# Altium PCB PCB1.PcbDoc (part 1 of 2)
Units mil, origin at the board's own origin, x right, y up, seen from the top; angles counter-clockwise.
Board outline 2200 x 3595 mil, 2 copper layers (Top Layer, Bottom Layer), stack 1.929 mil thick; 92 components, 67 nets, 296 pads, 85 vias.
Unrouted connection lines stored in the file: 1.
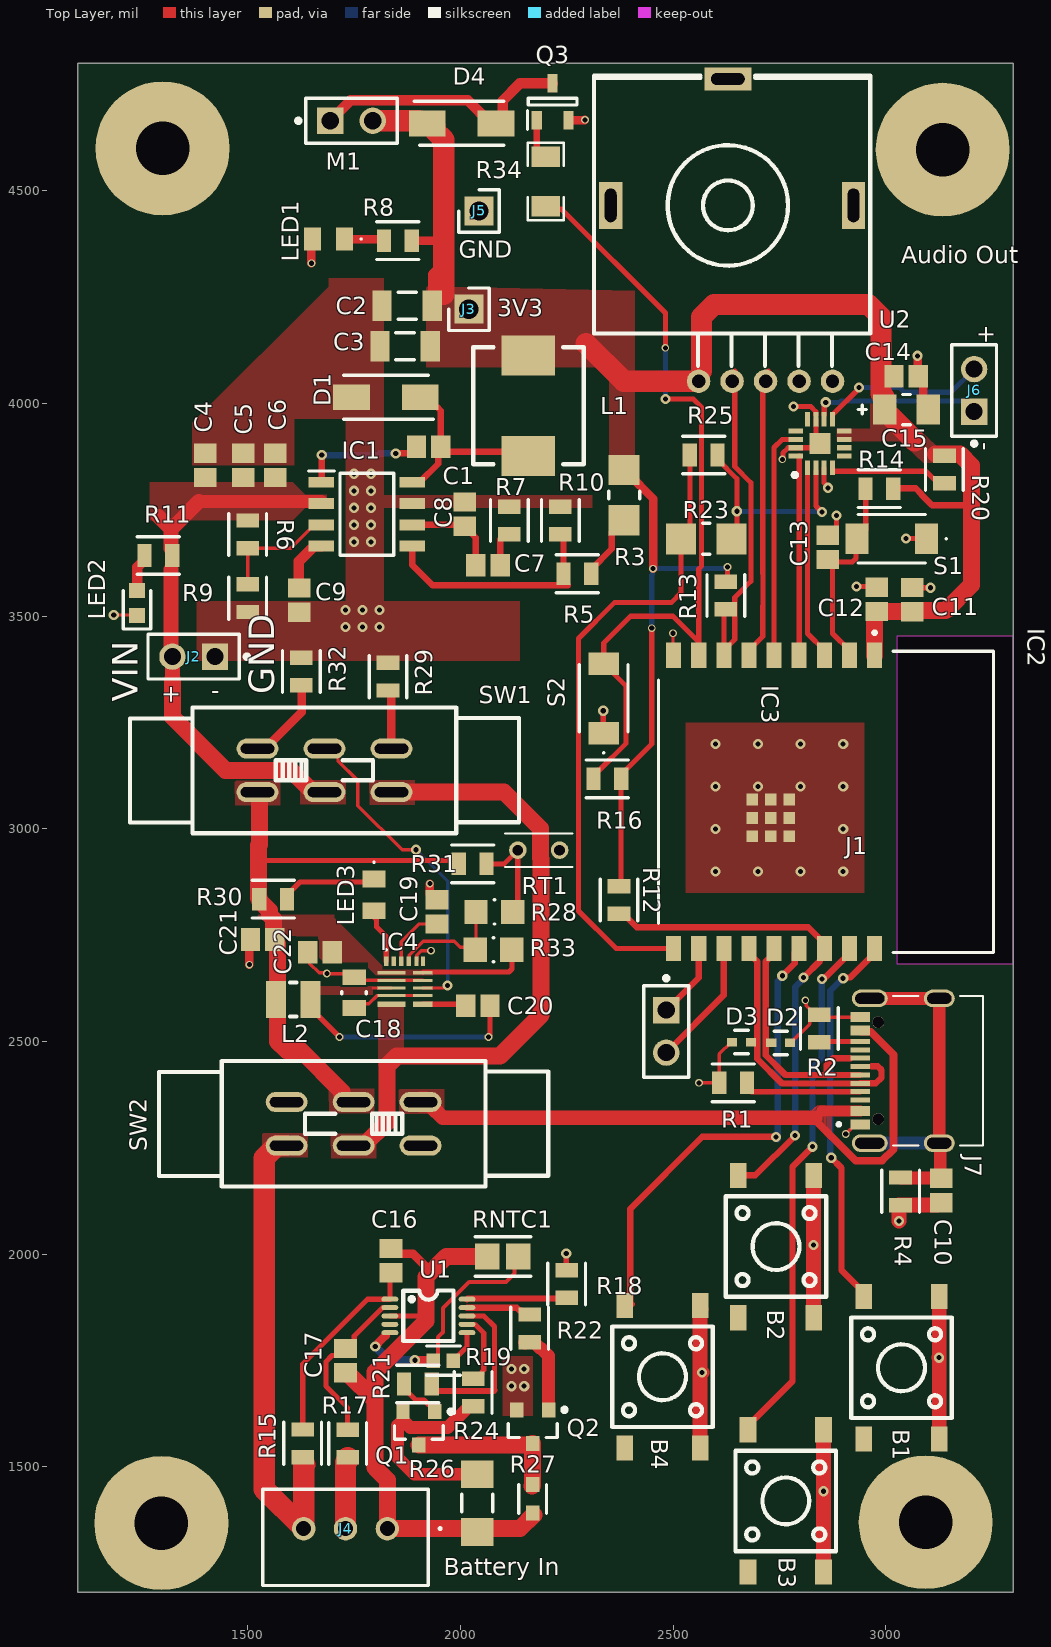
[diagram p0: Top Layer view]
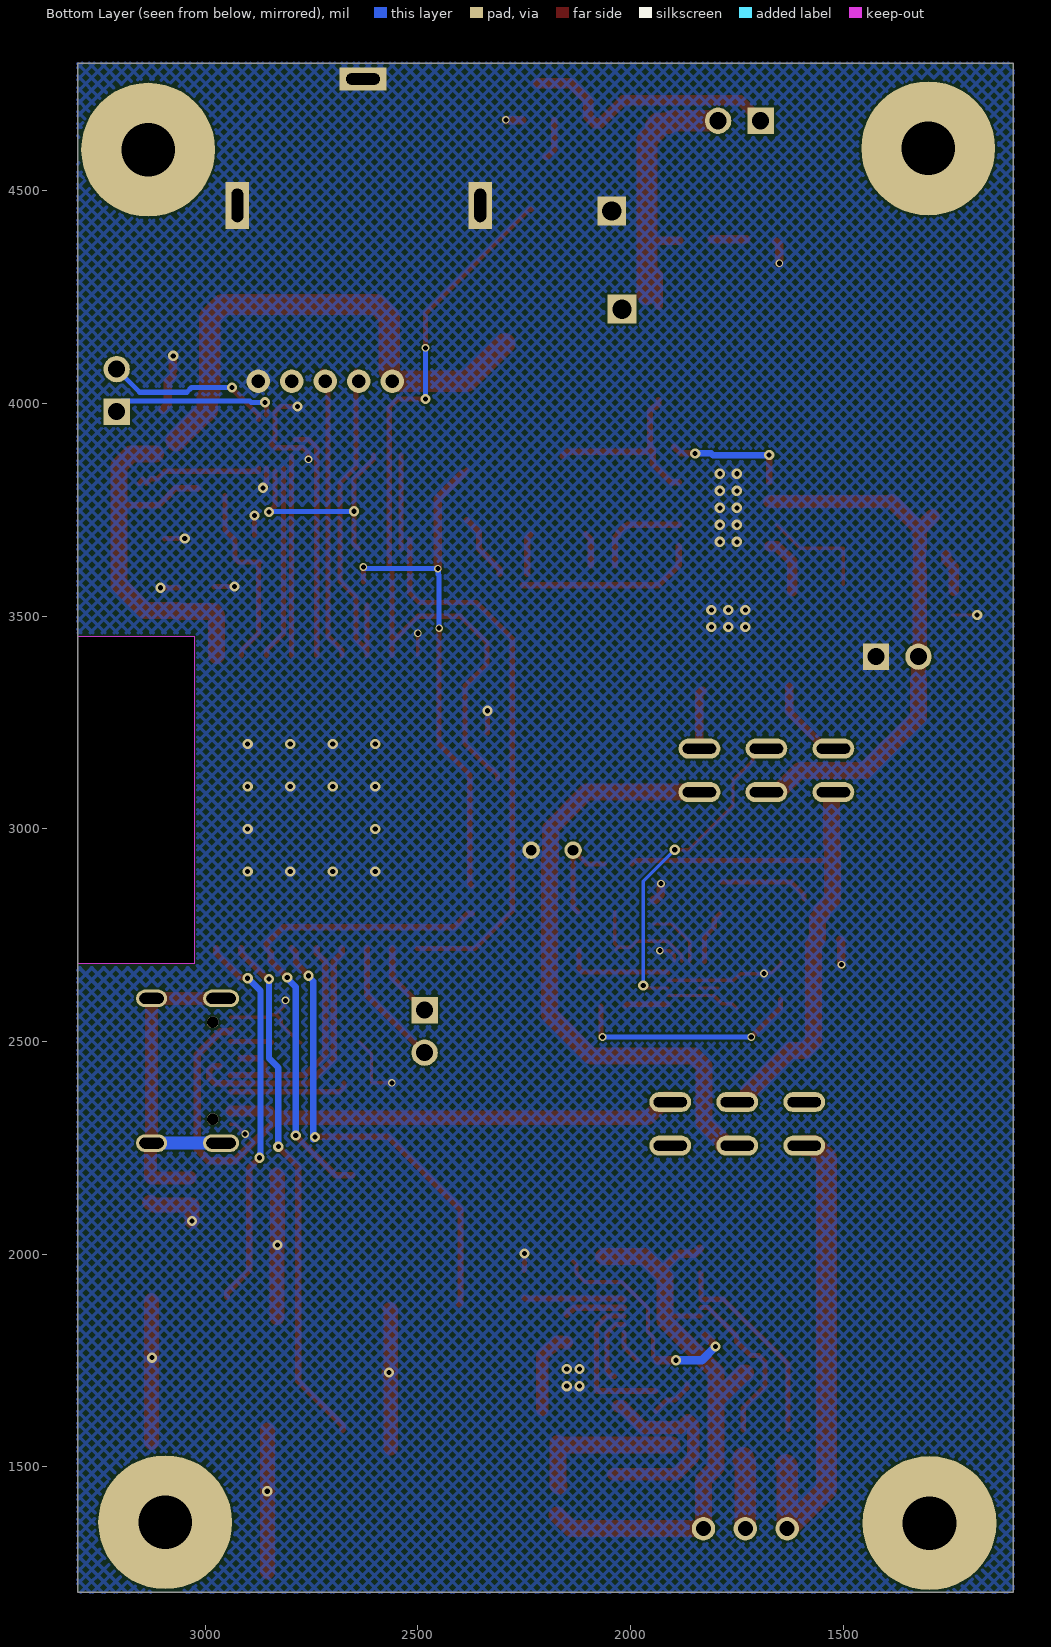
[diagram p1: Bottom Layer view, seen from below]
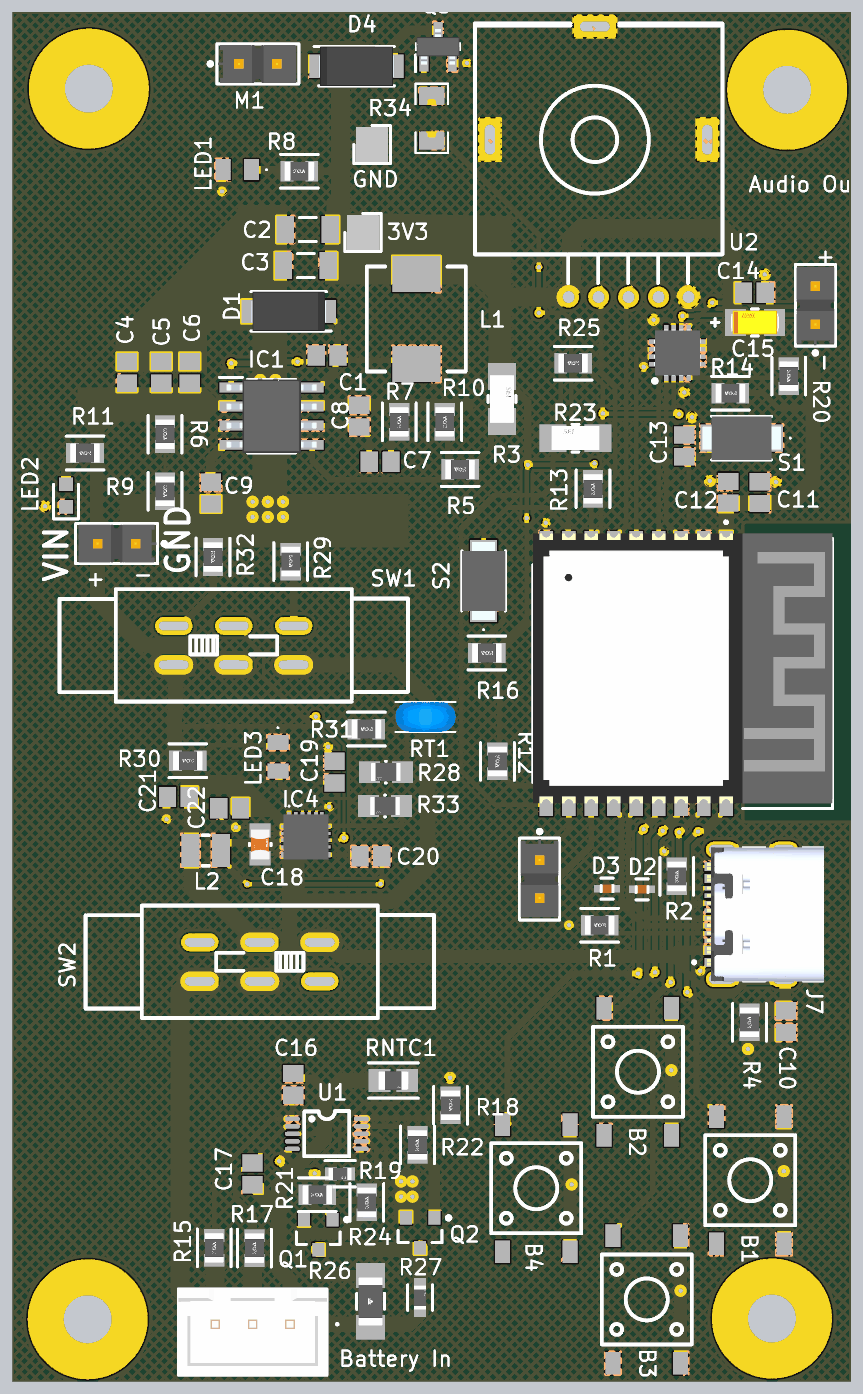
[diagram p2: 3D render of the assembled board from above, using the file's embedded part models]

## Layer stack, top to bottom
Board Layer Stack Top Coverlay: solder mask 1.083, FC-001, Dk 2.9
Top Layer: signal copper 0.4724
Dielectric 1: prepreg 0.984, PP-001, Dk 3.3
Bottom Layer: signal copper 0.4724
Board Layer Stack Bottom Coverlay: solder mask 1.083, FC-001, Dk 2.9

## Board outline
1100,1205 1100,1600 1100,4500 1100,4800 3300,4800 3300,1205
cut-out: 3026,3453 3026,2683 3300,2683 3300,3453

## Design rules (kind name [scope] priority, off if disabled: settings)
Clearance Clearance2 [OnLayer('Power')] p1: gap=10 ignorepadtopadclearanceinfootprint=TRUE
Clearance Clearance_1 [All] p2: gap=4.5 ignorepadtopadclearanceinfootprint=TRUE
DiffPairsRouting [All] p1: maxlimit=5 minlimit=4.5 mostfreqgap=4.5 toplayer_minwidth=12.65 toplayer_maxwidth=14.97 toplayer_prefwidth=12.65 bottomlayer_minwidth=12.65 bottomlayer_maxwidth=14.97 bottomlayer_prefwidth=12.65 maxuncoupledlength=500
HoleSize [All] p1 off: absolutevalues=TRUE maxlimit=100 minlimit=1 maxpercent=80.000 minpercent=20.000
MinimumSolderMaskSliver [All] p1 off: minsoldermaskwidth=10
PolygonConnect [All] p1: connectstyle=Direct reliefconductorwidth=10 reliefentries=4 polygonreliefangle="90 Angle" airgapwidth=10
RoutingVias [All] p1: holewidth=12 width=24 viastyle="Through Hole" minholewidth=12 minwidth=18 maxholewidth=25 maxwidth=50
SilkToSilkClearance [All] p1 off: silktosilkclearance=10
SilkToSolderMaskClearance [IsPad] p1 off: minsilkscreentomaskgap=10 clearancetoexposedcopper=TRUE
SolderMaskExpansion [All] p1: expansion=4 istentingtop=FALSE
SupplyNets "Schematic Supply Nets_10" [InNet('GND')] p1: voltage=0.000
SupplyNets "Schematic Supply Nets_9" [InNet('Midtap')] p2: voltage=0.000
SupplyNets "Schematic Supply Nets_8" [InNet('+5_preswitch')] p3: voltage=0.000
SupplyNets "Schematic Supply Nets_6" [InNet('Bat+_Preswitch')] p4: voltage=0.000
SupplyNets "Schematic Supply Nets_5" [InNet('Bat+')] p5: voltage=0.000
SupplyNets "Schematic Supply Nets_4" [InNet('+5_Charging')] p6: voltage=0.000
SupplyNets "Schematic Supply Nets_2" [InNet('Bat-')] p7: voltage=0.000
SupplyNets "Schematic Supply Nets_1" [InNet('Vin_Buck')] p8: voltage=0.000
SupplyNets "Schematic Supply Nets" [InNet('+3V3')] p9: voltage=0.000
Width [InNet('+3V3_RF')] p1: maxlimit=14.05 minlimit=14.05 preferedwidth=14.05 minimp=50.000000 maximp=50.000000 favimp=50.000000
Width Width_1 [InNet('NetC47_2')] p2: maxlimit=14.05 minlimit=14.05 preferedwidth=14.05 minimp=50.000000 maximp=50.000000 favimp=50.000000
Width Width2 [InNet('ANT_RF')] p3: maxlimit=14.05 minlimit=14.05 preferedwidth=14.05 minimp=50.000000 maximp=50.000000 favimp=50.000000 // NetC47_2
Width Widthall [All] p4: maxlimit=80 minlimit=4 preferedwidth=15 minimp=50.000000 maximp=50.000000 favimp=50.000000
25 further rules are at their usual default settings.

## Classes and differential pairs
differential pair class USB: ESP_USB_D
differential pair ESP_USB_D: +ESP_USB_D_P -ESP_USB_D_N

## Components (designator, comment, footprint, x,y, rotation, side; value= is the part's Value field where it differs from the comment)
B1 "C255812" Button 3039,1730 r270 top
B2 "C255812" Button 2744,2015 r270 top
B3 "C255812" Button 2767,1417 r270 top
B4 "C255812" Button 2477,1709 r270 top
C1 "0.1uF 0805" CAPC2013X94X50LL20T25 1925.54,3899 r180 top
C2 "47uF 1206 (25V)" CAPC1206(3216)190_N 1875,4230 r0 top value=47uF
C3 "47uF 1206 (25V)" CAPC1206(3216)190_N 1870,4135 r0 top value=47uF
C4 "4.7uF 0805" CAPC2013X94X50LL20T25 1400,3855 r90 top
C5 "4.7uF 0805" CAPC2013X94X50LL20T25 1490,3855 r90 top
C6 "0.01uF" CAPC2013X94X50LL20T25 1565,3855 r90 top
C7 "1nF 0805" CAPC2013X94X50LL20T25 2065,3620 r0 top
C8 "47pF 0805" CAPC2013X94X50LL20T25 2010,3740 r90 top
C9 "0.01uF 0805" CAPC2013X94X50LL20T25 1621,3538 r270 top
C10 "1nF 0805" CAPC2013X94X50LL20T25 3131,2150 r90 top
C11 "22uF" CAPC2013X94X50LL20T25 3062,3539 r90 top
C12 "0.1uF" CAPC2013X94X50LL20T25 2979,3540 r90 top
C13 "0.1uF 0805" CAPC2013X94X50LL20T25 2864,3662 r90 top
C14 "0.1uF 0805" CAPC2013X94X50LL20T25 3048,4064 r0 top
C15 "10uF" FP-TAJA-MFG 3049,3986 r180 top
C16 "0.1uF" CAPC2013X94X50LL20T25 1837,1985 r90 top
C17 "0.01uF" CAPC2013X94X50LL20T25 1730,1750 r270 top
C18 "4.7uF 0805" FP-CC0805-0_85-MFG 1750,2615 r90 top value="4.7 uF"
C19 "0.33uF 0805" CAPC2013X94X50LL20T25 1945,2805 r90 top
C20 "0.1uF 0805" CAPC2013X94X50LL20T25 2041,2584 r0 top
C21 "1uF" CAPC2013X94X50LL20T25 1535,2740 r180 top
C22 "4.7uF 0805" CAPC2013X94X50LL20T25 1670,2710 r180 top
D1 "SS34A" DIOM5026X262N 1825,4015 r180 top
D2 "ESD Diode" FP-GG0402-MFG 2752.95,2497 r0 top value=10pF
D3 "ESD Diode" FP-GG0402-MFG 2661,2499 r180 top value=10pF
D4 "SS34A" DIOM5026X262N 2003,4659 r0 top
IC1 "Buck converter" SOIC127P600X175-8N 1780,3740 r0 top
IC2 "ESP32-C3-WROOM-02-N4" ESP32C3WROOM02N4 2729.69,3026 r270 top
IC3 "MAX98357AETE+T" QFN50P300X300X80-17N 2845.53,3906.09 r90 top
IC4 "Battery Charger" SY6982CQDC 1870,2635 r0 top
J1 "USB-C" KINGHELM_KH-TYPE-C-16P 3126.02,2431.47 r90 top
J2 "TSW-102-07-F-S" FP-TSW-102-07-F-S-MFG 1373,3405 r180 top
J3 "3V3" HDRV1W66P0X254_1X1_213X254X1074P 2020,4222 r0 top
J4 "Battery In" B3BXHALFSN 1828.43,1355 r180 top
J5 "GND" HDRV1W66P0X254_1X1_213X254X1074P 2044,4453 r0 top
J6 "Audio Out" FP-TSW-102-07-F-S-MFG 3208,4031 r90 top
J7 "UART" FP-TSW-102-07-F-S-MFG 2484,2524 r270 top
L1 "6.8uH" IND-SMD_L7.0-W6.6 2160,3995 r90 top
L2 "0.68uH" IND-SMD_L2.5-W2.0 1607,2599 r0 top value=680nH
LED1 "Yellow" KT0805G 1690,4387 r90 top
LED2 "Red" LEDC1608X70N 1240,3531 r90 top
LED3 "Charging" KT0805G 1797,2845 r180 top
M1 "Haptic Feedback" FP-TSW-102-07-F-S-MFG 1744,4665 r0 top
Q1 "Discharge Protection" ONSC-SOT-23-3-318-08_V 1902.6,1590.63 r270 top
Q2 "Charge Protection" ONSC-SOT-23-3-318-08_V 2170,1595 r270 top
Q3 "C2150" SOT95P240X115-3N 2217,4710 r90 top
R1 "5.1k 0805" FP-RN73R2A-IPC_C 2641.5,2403 r180 top
R2 "5.1k 0805" FP-RN73R2A-IPC_C 2844,2531 r90 top
R3 "0ohm 1206" FP-HCJ1206-MFG 2385,3785 r270 top
R4 "1M 0805" FP-RN73R2A-IPC_C 3035,2148 r90 top
R5 "10k 0805" FP-RN73R2A-IPC_C 2275,3600 r180 top
R6 "330K 0805" FP-RN73R2A-IPC_C 1500,3692.5 r270 top
R7 "30K 0805" FP-RN73R2A-IPC_C 2115,3725 r90 top
R8 "330 0805" FP-RN73R2A-IPC_C 1853,4383 r0 top
R9 "68K 0805" FP-RN73R2A-IPC_C 1500,3542.5 r270 top
R10 "3.3k 0805" FP-RN73R2A-IPC_C 2235,3725 r90 top
R11 "1k 0805" FP-RN73R2A-IPC_C 1290,3643 r180 top
R12 "10k" FP-RN73R2A-IPC_C 2373,2833 r270 top
R13 "10k" FP-RN73R2A-IPC_C 2624,3549 r90 top
R14 "10k" FP-RN73R2A-IPC_C 2985,3800 r180 top
R15 "1k 0805" FP-RN73R2A-IPC_C 1629.34,1555.66 r90 top
R16 "10k" FP-RN73R2A-IPC_C 2345.5,3118 r180 top
R17 "1k 0805" FP-RN73R2A-IPC_C 1735,1555 r90 top
R18 "200k" FP-RN73R2A-IPC_C 2250,1930 r270 top
R19 "110K 0603" FP-RMCF0603-IPC_C 1960,1750 r0 top
R20 "680k 0805" FP-RN73R2A-IPC_C 3138,3845 r270 top
R21 "10k" FP-RN73R2A-IPC_C 1900,1695 r0 top
R22 "10k" FP-RN73R2A-IPC_C 2163,1826 r90 top
R23 "0ohm 1206" FP-HCJ1206-MFG 2578,3682 r0 top
R24 "2k" FP-RN73R2A-IPC_C 2030,1675 r90 top
R25 "100k 0805" FP-RN73R2A-IPC_C 2572,3879 r180 top
R26 "40mOhms 1206" FP-WSL1206-0_508-MFG 2040,1415 r90 top
R27 "3MOhms 0603" FP-AC0603-MFG 2170,1425 r90 top
R28 "0ohm 0805" FP-HCJ0805-MFG 2080,2805 r180 top
R29 "10k 0805" FP-RN73R2A-IPC_C 1830,3358 r270 top
R30 "1k 0805" FP-RN73R2A-IPC_C 1560,2835 r180 top
R31 "10k 0805" FP-RN73R2A-IPC_C 2029,2918 r180 top
R32 "20k 0805" FP-RN73R2A-IPC_C 1626,3370 r270 top
R33 "0ohm 0805" FP-HCJ0805-MFG 2078,2716 r180 top
R34 "C17887" "Resistor 300Ohms" 2198,4521 r90 top
RNTC1 "100KOHM 0805" FP-NCP21-0_2-IPC_A 2100,1995 r0 top
RT1 "NXRT15XH103FA1B030" THERM_NXRT15XH103FA1B030 2184.21,2950 r180 top
S1 "ESP_Reset" TS1088AR02016 3014.27,3682.27 r180 top
S2 "ESP_Boot_select" TS1088AR02016 2337,3307 r90 top
SW1 "DPDT Switch (fast charging siwtch, select for )" "PCBComponent_1 - duplicate" 1690.52,3141.64 r0 top
SW2 "DPDT Switch (fast charging siwtch, select for )" "PCBComponent_1 - duplicate" 1739,2303 r180 top
U1 "BMS" "MSOP-10_L3.0-W3.0-P0.50-LS4.9-BL - duplicate" 1925,1855 r270 top
U2 "C42411044" "Correct Joystick" 2629,4465 r0 top

## Footprints (in the part's own frame and the unit in brackets; to place one, negate y for a bottom-side part, rotate by r counter-clockwise, add the part's x,y. Pads: shape width x height; smd on the part's side, far side on the other; paste and mask are expansions set on the pad)
B3BXHALFSN [mm]
  round 1.4 hole 0.9: 1(0,0) 2(2.5,0) 3(5,0)
  silkscreen extent -3.2,-2.35 7.45,3.4, body extent -2.45,-2.35 7.45,3.4, height 7.09
Button [mm]
  rect 1.5x1 smd: 1(-4.33,2.202) 2(4.17,2.202) 3(-4.33,-2.298) 4(4.17,-2.298)
  silkscreen extent -3.08,-3.05 2.92,2.95
CAPC1206(3216)190_N [mm] "Chip Capacitor, Body 3.2x1.6mm, Height 1.9mm, IPC Medium Density"
  rect 1.15x1.8 smd: 1(-1.5,0) 2(1.5,0)
  silkscreen extent -0.55,-0.8 0.55,0.8, body extent -1.7,-0.9 1.7,0.9, height 1.9
CAPC2013X94X50LL20T25 [mm] "Chip Capacitor, 2-Leads, Body 2.01x1.25mm, IPC High Density"
  rect 1.15x1.35 smd: 1(-0.725,0) 2(0.725,0)
  body extent -1.1,-0.72 1.1,0.72, height 0.94
"Correct Joystick" [mm]
  round 1.4 hole 0.8: 1(-1.751,-10.476) 2(0.249,-10.476) 3(2.249,-10.476) 4(4.249,-10.476) 5(6.249,-10.476)
  rect 1.4x2.8 hole 0.7 slot 2 at 90 deg: 6(-7.001,0.024) 6(7.499,0.024)
  rect 2.8x1.4 hole 0.7 slot 2 at 0 deg: 6(-0.001,7.574)
  silkscreen extent -8,-9.55 8.51,7.77
DIOM5026X262N [mm]
  rect 2.2x1.55 smd: 1(-2.05,0) 2(2.05,0)
  silkscreen extent -2.83,-1.31 2.52,1.31, body extent -2.52,-1.31 2.52,1.31, height 2.62
ESP32C3WROOM02N4 [mm]
  rect 1.5x0.9 smd: 1(-9.71,6.2) 2(-9.71,4.7) 3(-9.71,3.2) 4(-9.71,1.7) 5(-9.71,0.2) 6(-9.71,-1.3) 7(-9.71,-2.8) 8(-9.71,-4.3) 9(-9.71,-5.8) 10(7.79,-5.8) 11(7.79,-4.3) 12(7.79,-2.8) 13(7.79,-1.3) 14(7.79,0.2) 15(7.79,1.7) 16(7.79,3.2) 17(7.79,4.7) 18(7.79,6.2)
  rect 0.7x0.7 smd: 19(0,0) 20(1.1,0) 21(1.1,1.1) 22(0,1.1) 23(-1.1,1.1) 24(-1.1,0) 25(-1.1,-1.1) 26(0,-1.1) 27(1.1,-1.1)
  silkscreen extent -11.16,-6.7 8.04,13.3, body extent -10.31,-6.7 7.69,13.3, height 3.2
FP-AC0603-MFG [mm]
  rect 0.9x0.8 smd paste+0 mask+0: 1(-0.85,0) 2(0.85,0)
  silkscreen extent -0.85,-0.82 0.85,0.82, body extent -1.4,-0.55 1.4,0.55, height 0.25
FP-CC0805-0_85-MFG [mm]
  rect 0.95x1.4 smd paste+0 mask+0: 1(-0.925,0) 2(0.925,0)
  silkscreen extent -0.08,-0.72 0.08,0.72, body extent -1.6,-1.05 1.6,1.05, height 0.25
FP-GG0402-MFG [mm]
  rect 0.61x0.51 smd paste+0 mask+0: 1(-0.56,0) 2(0.56,0)
  silkscreen extent -0.4,-0.7 0.4,0.7, body extent -0.96,-0.43 0.96,0.43, height 0.25
FP-HCJ0805-MFG [mm]
  rect 1.4x1.44 smd paste+0 mask+0: 1(-1.1,0) 2(1.1,0)
  silkscreen extent -0.03,-0.72 0.03,0.72, body extent -1.9,-0.82 1.9,0.82, height 0.25
FP-HCJ1206-MFG [mm]
  rect 1.8x1.84 smd paste+0 mask+0: 1(-1.5,0) 2(1.5,0)
  silkscreen extent -0.23,-0.92 0.23,0.92, body extent -2.5,-1.02 2.5,1.02, height 0.25
FP-NCP21-0_2-IPC_A [mil]
  rect 57.27x61.27 smd paste+0 mask+0: 1(-36.45,0) 2(36.45,0)
  silkscreen extent -65,-46 65,46, body extent -85,-50 85,50, height 10
FP-RMCF0603-IPC_C [mil]
  rect 31.73x33.79 smd paste+0 mask+0: 1(-23.66,0) 2(23.66,0)
  silkscreen extent -40,-34 40,34, body extent -43,-23 43,23, height 10
FP-RN73R2A-IPC_C [mil]
  rect 33.67x53.39 smd paste+0 mask+0: 1(-32.5,0) 2(32.5,0)
  silkscreen extent -49,-44 49,44, body extent -53,-32 53,32, height 10
FP-TAJA-MFG [mm]
  rect 1.4x1.8 smd paste+0 mask+0: 1(-1.3,0) 2(1.3,0)
  silkscreen extent -0.23,-0.9 2.9,0.9, body extent -2.1,-1 2.1,1, height 0.25
FP-TSW-102-07-F-S-MFG [mm]
  rect 1.57x1.57 hole 1.02 paste-2539.97 mask+0: 1(-1.27,0)
  round 1.57 hole 1.02 paste-2539.97 mask+0: 2(1.27,0)
  silkscreen extent -3.3,-1.34 2.73,1.34, body extent -2.83,-1.44 2.83,1.44, height 0.25
FP-WSL1206-0_508-MFG [mm]
  rect 1.65x1.93 smd paste+0 mask+0: 1(-1.725,0) 2(1.725,0)
  silkscreen extent -0.53,-0.93 0.53,0.93, body extent -2.65,-1.06 2.65,1.06, height 0.25
HDRV1W66P0X254_1X1_213X254X1074P [mm]
  rect 1.725x1.725 hole 1.15: 1(0,0)
  silkscreen extent -1.21,-1.27 1.21,1.27, body extent -1.07,-1.17 1.07,1.17, height 10.37
IND-SMD_L2.5-W2.0 [mm]
  rect 1.2x2.2 smd: 1(1.028,0) 2(-1.028,0)
  silkscreen extent -0.2,-1.02 0.2,1.02
IND-SMD_L7.0-W6.6 [mm]
  rect 2.4x3.2 smd: 1(-3,0) 2(3,0)
  silkscreen extent -3.5,-3.3 3.5,3.3
KINGHELM_KH-TYPE-C-16P [mm]
  rect 0.6x1.15 smd: A1_B12(-3.2,4.725) A4_B9(-2.4,4.725) A9_B4(2.4,4.725) A12_B1(3.2,4.725)
  rect 0.3x1.15 smd: A5(-1.25,4.725) A6(-0.25,4.725) A7(0.25,4.725) A8(1.25,4.725) B5(1.75,4.725) B6(0.75,4.725) B7(-0.75,4.725) B8(-1.75,4.725)
  oval 1.05x1.85 hole 0.65 slot 1.45 at 90 deg: SH1(-4.32,0) SH2(4.32,0)
  oval 1.05x2.15 hole 0.65 slot 1.75 at 90 deg: SH3(-4.32,4.15) SH4(4.32,4.15)
  round 0.7 hole 0.7 unplated: ""(-2.89,3.65) ""(2.89,3.65)
  silkscreen extent -4.47,-2.6 4.47,6.1, body extent -4.47,-2.67 4.47,5.14, height 3.41
KT0805G [mm]
  rect 1.4x1 smd: 1(0,-0.95) 2(0,0.95)
  silkscreen extent -0.05,-2 0.05,-1.9
LEDC1608X70N [mm]
  rect 0.9x0.95 smd: 1(-0.75,0) 2(0.75,0)
  silkscreen extent -1.55,-0.82 0.75,0.82
"MSOP-10_L3.0-W3.0-P0.50-LS4.9-BL - duplicate" [mm]
  oval 0.3x1 smd: 1(-1,-2.3) 2(-0.5,-2.3) 3(0,-2.3) 4(0.5,-2.3) 5(1,-2.3) 6(1,2.3) 7(0.5,2.3) 8(0,2.3) 9(-0.5,2.3) 10(-1,2.3)
  silkscreen extent -1.52,-1.5 1.5,1.5
ONSC-SOT-23-3-318-08_V [mm] "SOT23, 3-Leads, Body 2.92x1.3mm, Pitch 0.95mm"
  rect 0.9x0.8 smd: 1(-1,0.95) 2(-1,-0.95) 3(1,0)
  silkscreen extent -1.12,-1.46 0.65,2.03, body extent -0.65,-1.46 0.65,1.46, height 1.11
"PCBComponent_1 - duplicate" [mm]
  oval 2.5x1.2 hole 0.6 slot 2 at 0 deg paste-2539.97 mask+0.05: 1(-4.254,1.203) 2(-0.254,1.203) 3(3.746,1.203) 4(-4.254,-1.397) 5(-0.254,-1.397) 6(3.746,-1.397)
  silkscreen extent -11.87,-3.85 11.37,3.65
QFN50P300X300X80-17N [mm]
  rect 0.85x0.3 smd: 1(-1.45,0.75) 2(-1.45,0.25) 3(-1.45,-0.25) 4(-1.45,-0.75) 9(1.45,-0.75) 10(1.45,-0.25) 11(1.45,0.25) 12(1.45,0.75)
  rect 0.3x0.85 smd: 5(-0.75,-1.45) 6(-0.25,-1.45) 7(0.25,-1.45) 8(0.75,-1.45) 13(0.75,1.45) 14(0.25,1.45) 15(-0.25,1.45) 16(-0.75,1.45)
  rect 1.25x1.25 smd: 17(0,0)
  silkscreen extent -2,1.37 -1.75,1.62, body extent -1.55,-1.55 1.55,1.55, height 0.8
"Resistor 300Ohms" [mil]
  rect 47.54x66.97 smd paste-3937.01 mask+2: 1(-57.23,-2.52) 2(59.21,-2.52)
  silkscreen extent -90,-45 92,40
SOIC127P600X175-8N [mm]
  rect 1.525x0.65 smd: 1(-2.712,1.905) 2(-2.712,0.635) 3(-2.712,-0.635) 4(-2.712,-1.905) 5(2.712,-1.905) 6(2.712,-0.635) 7(2.712,0.635) 8(2.712,1.905)
  silkscreen extent -3.47,-2.45 1.6,2.58, body extent -3,-2.45 3,2.45, height 1.75
SOT95P240X115-3N [mm]
  rect 1.1x0.6 smd: 1(-1.1,0.95) 2(-1.1,-0.95) 3(1.1,0)
  silkscreen extent -1.65,-1.45 0.2,1.5, body extent -1.2,-1.45 1.2,1.45, height 1.15
SY6982CQDC [mm]
  rect 0.25x0.575 smd: 1(-1.125,1.363) 2(-0.675,1.363) 3(-0.225,1.363) 4(0.225,1.363) 5(0.675,1.363) 6(1.065,1.363)
  rect 1.17x0.225 smd: 7(1.065,0.688)
  rect 1.17x0.2 smd: 8(1.065,0.225) 9(1.065,-0.225) 10(1.065,-0.675)
  rect 1.17x0.35 smd: 11(1.065,-1.2)
  rect 1.68x0.35 smd: 12(-0.81,-1.2)
  rect 1.68x0.2 smd: 13(-0.81,-0.675) 14(-0.81,-0.225) 15(-0.81,0.225)
  rect 1.68x0.225 smd: 16(-0.81,0.688)
  silkscreen extent -1.17,2 -1.08,2.1, body extent -1.5,-1.5 1.5,1.5, height 1
THERM_NXRT15XH103FA1B030 [mm]
  round 1.05 hole 0.65: 1(-1.25,0) 2(1.25,0)
  silkscreen extent -2,-1 2,1, body extent -2,-1 2,1, height 7.49
TS1088AR02016 [mm]
  rect 1.35x1.8 smd: 1(-2.075,0) 2(2.075,0)
  silkscreen extent -3.3,-1.45 2,1.45, body extent -2.62,-1.45 2.62,1.45, height 2.1

## Part data
B1 B2 B3 B4: library part 1TS005F-2500-5001, "Switch", Manufacturer_Name="HYP (Hongyuan Precision)", Datasheet Link=https://datasheet.lcsc.com/szlcsc/HYP-1TS005F-2500-5001_C255812.pdf, Height=5.1mm, Manufacturer_Part_Number=1TS005F-2500-5001
C1 C12 C13 C14 C16 C20: library part CMP-2007-04160-1, "C28233", Manufacturer="AVX Interconnect / Elco", Part Number=08051C102KAT4A
C2 C3: library part CMP-1037-05002-1, "C6119973", Case-EIA=1206, Case-Metric=3216, Rated Voltage="10 V", Tolerance=Â±20%, Max Thickness="1.9 mm", Technology=SMT
C4 C5 C22: library part CMP-2007-04160-1, "C1779", Manufacturer="AVX Interconnect / Elco", Part Number=08051C102KAT4A
C6 C9 C17: library part CMP-2007-04160-1, "C1710", Manufacturer="AVX Interconnect / Elco", Part Number=08051C102KAT4A
C7 C10: library part CMP-2007-04160-1, "C46653", Manufacturer="AVX Interconnect / Elco", Part Number=08051C102KAT4A
C8: library part CMP-2007-04160-1, "C14857", Manufacturer="AVX Interconnect / Elco", Part Number=08051C102KAT4A
C11: library part CMP-2007-04160-1, "C45783", Manufacturer="AVX Interconnect / Elco", Part Number=08051C102KAT4A
C15: library part CMP-1661-00004-2, "C7171", Case Code (Imperial)=1206, Case Code (Metric)=3216, Dielectric Material=Tantalum, ESR (Equivalent Series Resistance)=3R, Leakage Current=1.6uA, Max Operating Temperature=125°C, Min Operating Temperature=-55°C, Package Quantity=1, Tolerance=10%, Voltage=16V, Capacitance=10uF, Case/Package=1206, Depth=1.6mm, Dissipation Factor=8%, Features="General Purpose", Height=1.6mm, Height - Seated (Max)=0.071inch, LCSC=C7171, Lead Free="Lead Free", Lead Pitch=1.1mm, Length=3.2mm, Mount="Surface Mount", Number of Pins=2, Packaging="Tape and Reel", Polarity=Polar, Radiation Hardening=No, REACH SVHC="No SVHC", Termination=SMD/SMT, Voltage Rating=16V, Voltage Rating (DC)=16V, Width=1.6mm
C18: library part CMP-03422-000966-1, "C1779", Capacitance="4.7 uF", Manufacturer=Yageo, Manufacturer Part Number=CC0805KKX5R9BB475, Package=CC0805-0.85, Temperature="-30°C to +85°C", Temperature Characteristic=X5R, Temperature Range High=+85°C, Temperature Range Low=-30°C, Tolerance=0.1, Voltage Rating="50 V", Automotive=No, Category=Cap, ComponentLink2Description=Datasheet, ComponentLink2URL=http://www.yageo.com/documents/recent/UPY-GPHC_Y5V_6.3V-to-50V_8.pdf, Device Class L1="Passive Components", Device Class L2=Capacitors, Device Class L3="Ceramic Capacitors", Digikey Description="CAP CER 4.7UF 50V X5R 0805", Footprint Url=http://www.yageo.com/exep/pages/download/literatures/UPY-C_GEN_24.pdf, Height=0.95mm, Ipc Land Pattern Name=CAPC200125X85, Lead Free=Yes, Material=Ceramic, Octopart=https://octopart.com/cc0805kkx5r9bb475-yageo-81932641, RoHS=TRUE
C19: library part CMP-2007-04160-1, "C1740", Manufacturer="AVX Interconnect / Elco", Part Number=08051C102KAT4A
C21: library part CMP-2007-04160-1, "C28323", Manufacturer="AVX Interconnect / Elco", Part Number=08051C102KAT4A
D1: "C8678", Manufacturer_Name="HY Electronic", Datasheet Link=https://datasheet.datasheetarchive.com/originals/distributors/Datasheets-3/DSA-43252.pdf, Height=2.62mm, Manufacturer_Part_Number=SS34A
D2 D3: library part CMP-04587-000001-1, "C10662", Breakdown Voltage=5.5V, Capacitance=10pF, Clamping Voltage=12V, Manufacturer="AVX Corporation", Manufacturer Part Number=GG040205100N2P, Package=GG0402, Peak Pulse Current=16A, Peak Pulse Power=96W, Reverse Standoff Voltage=5V, Temperature="-55°C to +125°C", Temperature Range High=+125°C, Temperature Range Low=-55°C, Automotive=No, Category=Diode, ComponentLink2Description=Datasheet, ComponentLink2URL=http://datasheets.avx.com/AVX-GiGuard.pdf, Device Class L1="Circuit Protection", Device Class L2="TVS Diodes", Device Class L3=unset, Digikey Description="TVS DIODE 5V 12V 0402", Direction=Bidirectional, Height=0.55mm, Ipc Land Pattern Name=DIOC10060X50, Lead Free=Yes, Number Of Channels=1, Octopart=https://octopart.com/gg040205100n2p-avx-81066081, RoHS=TRUE
D4: "Diode", Manufacturer_Name="HY Electronic", Datasheet Link=https://datasheet.datasheetarchive.com/originals/distributors/Datasheets-3/DSA-43252.pdf, Height=2.62mm, Manufacturer_Part_Number=SS34A
IC1: library part TPS54331D, "C9865", Manufacturer_Name="Texas Instruments", Mouser Part Number=595-TPS54331D, Arrow Part Number=TPS54331D, Arrow Price/Stock=https://www.arrow.com/en/products/tps54331d/texas-instruments?utm_currency=USD&region=europe, Datasheet Link=http://www.ti.com/lit/gpn/tps54331, Height=1.75mm, Manufacturer_Part_Number=TPS54331D, Mouser Price/Stock=https://www.mouser.co.uk/ProductDetail/Texas-Instruments/TPS54331D?qs=QyYHynRG50pEbpiybdzwkw%3D%3D
IC2: "C2934560", Manufacturer_Name="Espressif Systems", Mouser Part Number=356-ESP32C3WROOM02N4, Datasheet Link=https://www.mouser.ch/datasheet/2/891/Espressif_ESP32_C3_WROOM_02-2006871.pdf, Height=3.35mm, Manufacturer_Part_Number=ESP32-C3-WROOM-02-N4, Mouser Price/Stock=https://www.mouser.co.uk/ProductDetail/Espressif-Systems/ESP32-C3-WROOM-02-N4?qs=stqOd1AaK7%2FqjTZKEOgfUg%3D%3D
IC3: "C910544", Manufacturer_Name="Analog Devices", Mouser Part Number=700-MAX98357AETE+T, Arrow Part Number=MAX98357AETE+T, Arrow Price/Stock=https://www.arrow.com/en/products/max98357aetet/analog-devices?utm_currency=USD&region=nac, Datasheet Link=https://datasheets.maximintegrated.com/en/ds/MAX98357A-MAX98357B.pdf, Height=0.8mm, Manufacturer_Part_Number=MAX98357AETE+T, Mouser Price/Stock=https://www.mouser.co.uk/ProductDetail/Analog-Devices-Maxim-Integrated/MAX98357AETE%2bT?qs=AAveGqk956HhNpoJjF5x2g%3D%3D
IC4: library part SY6982CQDC, "C7435940", Manufacturer_Name=Silergy, Datasheet Link=https://arvidtek.com/wp-content/uploads/2025/01/2307111037_Silergy-Corp-SY6982CQDC_C7435940.pdf, Height=0.9mm, Manufacturer_Part_Number=SY6982CQDC
J1: library part KH-TYPE-C-16P, "C2765186", Package=None, Check_prices=https://www.snapeda.com/parts/KH-TYPE-C-16P/Kinghelm/view-part/?ref=eda, MF=kinghelm, MP=KH-TYPE-C-16P, SnapEDA_Link=https://www.snapeda.com/parts/KH-TYPE-C-16P/Kinghelm/view-part/?ref=snap
J2 J6 J7 M1: library part CMP-02766-001458-1, "CONN HEADER VERT 2POS 2.54MM", Color=Black, Flammability Rating="UL94 V-0", Max Current Rating=7.6A, Max Operating Temperature=125°C, Max Voltage Rating (AC)=550V, Min Operating Temperature=-55°C, Package Quantity=1, Connector Type=Header, Contact Finish - Mating=GOLD, Contact Material=Bronze, Contact Mating Length=0.23inch, Contact Plating=Gold, Contact Shape=Square, Contact Type="Male Pin", Depth=2.54mm, Fastening Type=Pull, Gender=Male, Housing Color=Black, Housing Material=Polyester, Insulation Color=Black, Insulation Material=PBT, Length=5.08mm, Mount="Through Hole", Number of Contacts=2, Number of Positions=2, Number of Rows=1, Orientation=Straight, Packaging=Bulk, Pitch=2.54mm, Radiation Hardening=No, REACH SVHC="No SVHC", RoHS Compliant=Yes, Series=TSW, Termination=Solder
J3 J5: library part 87224-1, "Connector", Manufacturer_Name="TE Connectivity", Mouser Part Number=571-872241, Arrow Part Number=87224-1, Arrow Price/Stock=https://www.arrow.com/en/products/87224-1/te-connectivity?region=nac, Datasheet Link=https://www.te.com/commerce/DocumentDelivery/DDEController?Action=srchrtrv&DocNm=87224&DocType=Customer+Drawing&DocLang=English, Height=10.744mm, Manufacturer_Part_Number=87224-1, Mouser Price/Stock=https://www.mouser.co.uk/ProductDetail/TE-Connectivity/87224-1?qs=uJX40y%252BSWqgHHhtbHlovpg%3D%3D
J4: library part B3B-XH-A_LF__SN_, "C144394", Arrow Part Number=B3B-XH-A(LF)(SN), Manufacturer_Name="JST (JAPAN SOLDERLESS TERMINALS)", Mouser Part Number=306-B3BXHALFSNP, Arrow Price/Stock=https://www.arrow.com/en/products/b3b-xh-a-lf-sn/jst-manufacturing?utm_currency=USD&region=europe, Datasheet Link=https://datasheet.lcsc.com/szlcsc/1812131720_JST-Sales-America-B3B-XH-A-LF-SN_C144394.pdf, Height=7mm, Manufacturer_Part_Number=B3B-XH-A(LF)(SN), Mouser Price/Stock=https://www.mouser.co.uk/ProductDetail/JST-Commercial/B3B-XH-ALFSN?qs=cdbOS8ANM9BVkoboCCIEMQ%3D%3D
L1: library part FXL0630-6R8-M, "C167221", Current - Saturation(Isat)=6A, Current Rating=5A, DC Resistance(DCR)=48mΩ, JLCPCB Part Class="Extended Part", LCSC Part Name="6.8uH ±20% 6A", Manufacturer=cjiang(长江微电), Tolerance=±20%, Add into BOM=yes, Convert to PCB=yes, Datasheet=https://item.szlcsc.com/datasheet/FXL0630-6R8-M/178604.html, Device=FXL0630-6R8-M, Manufacturer Part=FXL0630-6R8-M, Supplier=LCSC, Supplier Footprint=SMD,7x6.6mm, Supplier Part=C167221, Symbol=FXL0630-6R8-M, Type="Molded Inductor"
L2: library part 252012CDMCDDS-R68MC, "C492726", Current - Saturation(Isat)=6.3A, Current Rating=-, DC Resistance(DCR)=30mΩ, JLCPCB Part Class="Extended Part", LCSC Part Name="680nH ±20% 6.3A", Manufacturer=Sumida(胜美达), Tolerance=±20%, Add into BOM=yes, Convert to PCB=yes, Datasheet=https://item.szlcsc.com/datasheet/252012CDMCDDS-R68MC/503355.html, Device=252012CDMCDDS-R68MC, Manufacturer Part=252012CDMCDDS-R68MC, Ratings=-, Supplier=LCSC, Supplier Footprint=1008, Supplier Part=C492726, Symbol=252012CDMCDDS-R68MC, Type="Molded Inductor"
LED1: library part KT-0805G, "C2296", Manufacturer_Name="Hubei KENTO Elec", Datasheet Link=https://jlcpcb.com/api/file/downloadByFileSystemAccessId/8639582106239348736, Height=0.95mm, Manufacturer_Part_Number=KT-0805G
LED2: library part KT-0603R, "C2286", Manufacturer_Name="Hubei KENTO Elec", Datasheet Link=https://datasheet.lcsc.com/szlcsc/Hubei-KENTO-Elec-KT-0603R_C2286.pdf, Height=0.7mm, LCSC=C2286, Manufacturer_Part_Number=KT-0603R
LED3: library part KT-0805G, "C2297", Manufacturer_Name="Hubei KENTO Elec", Datasheet Link=https://jlcpcb.com/api/file/downloadByFileSystemAccessId/8639582106239348736, Height=0.95mm, Manufacturer_Part_Number=KT-0805G
Q1 Q2: library part CMP-1058-00781-1, "C20917", Manufacturer="On Semiconductor", Package Type=SOT-23-3, PartNumber=2N7002LT1G, Channel Polarity="N Channel", ComponentLink1Description="Manufacturer URL", ComponentLink1URL=http://www.onsemi.com/, ComponentLink2Description=Datasheet, ComponentLink2URL=http://www.onsemi.com/pub_link/Collateral/2N7002L-D.PDF, ComponentLink3Description="Package Specification", ComponentLink3URL=http://www.onsemi.cn/pub_link/Collateral/318-08.PDF, Configuration=Single, DatasheetVersion="Rev. 7", ID Max (A)=0.115, Mounting Technology="Surface Mount", PackageDescription="3-Pin Small Outline Transistor, Body 2.92 x 1.3 mm, Pitch 0.95 mm", PackageReference=SOT-23-3-318-08, PackageVersion="Rev. AP, 11/2009", Packing="Tape and Reel", RoHS=Pb-Free, V(BR)DSS Min (V)=60, VGS Max (V)=20, VGS(th) Max (V)=2.5
Q3: library part SS8050-G, Manufacturer_Name="Comchip Technology", Mouser Part Number=750-SS8050-G, Arrow Part Number=SS8050-G, Arrow Price/Stock=https://www.arrow.com/en/products/ss8050-g/comchip-technology?region=nac, Datasheet Link=https://datasheet.datasheetarchive.com/originals/distributors/DKDS-12/229454.pdf, Height=1.15mm, Manufacturer_Part_Number=SS8050-G, Mouser Price/Stock=https://www.mouser.co.uk/ProductDetail/Comchip-Technology/SS8050-G?qs=LLUE9lz1YbcHg%252BWLMAtcrQ%3D%3D
R1 R2: library part CMP-04015-014497-1, "C27834"
R3 R23: library part CMP-26527-002752-1, "C17888", Case Code (Imperial)=1206, Case Code (Metric)=3216, Max Operating Temperature=155°C, Min Operating Temperature=-55°C, Package Quantity=5000, Resistance=0mR, Case/Package=1206, Features="Automotive AEC-Q200", Height=0.026inch, Length=0.122inch, Mount="Surface Mount", Number of Terminations=2, Packaging="Tape and Reel", Radiation Hardening=No, RoHS Compliant=Yes, Termination=Wraparound, Width=0.061inch
R4: library part CMP-04015-014497-1, "C17514"
R5 R12 R13 R14 R16 R21 R22 R29 R31: library part CMP-04015-014497-1, "C17414"
R6: library part CMP-04015-014497-1, "C17629"
R7: library part CMP-04015-014497-1, "C17621"
R8: library part CMP-04015-014497-1, "C17630"
R9: library part CMP-04015-014497-1, "C17801"
R10: library part CMP-04015-014497-1, "C26010"
R11 R15 R17 R30: library part CMP-04015-014497-1, "C1015"
R18: library part CMP-04015-014497-1, "C17539"
R19: library part CMP-26527-002287-1, "C25805", Case Code (Imperial)=0603, Case Code (Metric)=1608, Max Operating Temperature=155°C, Max Power Dissipation=100mW, Min Operating Temperature=-55°C, Resistance=110kR, Resistor Type="Thick Film", Temperature Coefficient=200ppm/°C, Tolerance=5%, Case/Package=0603, Contact Plating=Tin, Features="Automotive AEC-Q200", Height=0.022inch, Lead Free="Lead Free", Length=0.061inch, Mount="Surface Mount", Number of Terminations=2, Packaging="Tape and Reel", Power Rating=100mW, Radiation Hardening=No, RoHS Compliant=Yes, Series=RMCF, Size Code=0603, Width=0.031inch
R20: library part CMP-04015-014497-1, "C17797"
R24: library part CMP-04015-014497-1, "C17604"
R25: library part CMP-04015-014497-1, "C149504"
R26: library part CMP-2003-04359-2, "C49654479", Case Code (Imperial)=1206, Case Code (Metric)=3216, Max Operating Temperature=170°C, Max Power Dissipation=500mW, Min Operating Temperature=-65°C, Power Rating=250mW, Resistance=40mΩ, Temperature Coefficient=75ppm/°C, Tolerance=1%, Case/Package=1206, Composition="Metal Element", Contact Plating=Tin, Depth=1.6mm, Features="Moisture Resistant", Height=635µm, Lead Free="Lead Free", Length=3.2mm, Military Standard=Not, Mount="Surface Mount", NexarPartId=39745044, Number of Pins=1206, Number of Terminations=2, Packaging="Cut Tape", Radiation Hardening=No, REACH SVHC=Unknown, RoHS=Compliant, Schedule B="8533210045, 8533210045", Termination=SMD/SMT, Width=1.6002mm
R27: library part CMP-03412-043951-1, "RES 3MΩ 1.00% 0.1W 0603", Case Code (Imperial)=0603, Case Code (Metric)=1608, Max Operating Temperature=155°C, Max Power Dissipation=100mW, Min Operating Temperature=-55°C, Resistance=3MR, Resistor Type="Thick Film", Temperature Coefficient=100ppm/°C, Tolerance=1%, Voltage Rating=50V, Case/Package=0603, Features="Moisture Resistant", Height=0.022inch, Length=0.063inch, Number of Terminations=2, Packaging="Tape and Reel", Power Rating=100mW, RoHS Compliant=Yes, Series=AC, Termination=SMD/SMT, Width=0.8mm
R28 R33: library part CMP-26527-000104-1, "C17477", Case Code (Imperial)=0805, Case Code (Metric)=2012, Max Operating Temperature=155°C, Min Operating Temperature=-55°C, Package Quantity=1, Resistance=0mR, Case/Package=0805, Height=0.026inch, Lead Free="Lead Free", Length=0.079inch, Mount="Surface Mount", Number of Terminations=2, Packaging="Tape and Reel", Radiation Hardening=No, RoHS Compliant=Yes, Termination=Wraparound, Width=0.049inch
R32: library part CMP-04015-014497-1, "C4328"
R34: library part "Resistor 300Ohms"
RNTC1: library part CMP-06022-000440-1, "C338605", Case Code (Imperial)=0805, Case Code (Metric)=2012, Current Rating=100uA, Max Operating Temperature=125°C, Max Power Dissipation=200mW, Min Operating Temperature=-40°C, Package Quantity=4000, Resistance=100kR, Tolerance=5%, Accuracy=3%, Case/Package=0805, Depth=1.25mm, Height=0.85mm, Lead Free="Lead Free", Length=2mm, Mount="Surface Mount", Number of Pins=2, Packaging="Tape and Reel", Power Rating=200mW, Radiation Hardening=No, REACH SVHC="No SVHC", Termination=SMD/SMT, Width=1.25mm
RT1: "THERMISTOR NTC 10KOHM 3380K BEAD", Package="RADIAL-2 Murata", Availability=Good, Check_prices=https://www.snapeda.com/parts/NXRT15XH103FA1B030/Murata/view-part/4970536/?ref=eda, MF=Murata, MP=NXRT15XH103FA1B030, Price=None, Purchase-URL=https://pricing.snapeda.com/search/part/NXRT15XH103FA1B030/?ref=eda, SnapEDA_Link=https://www.snapeda.com/parts/NXRT15XH103FA1B030/Murata/view-part/4970536/?ref=snap
S1 S2: library part TS-1088-AR02016, "C720477", Manufacturer_Name=XUNPU, Datasheet Link=https://www.xunpudianzi.com/uploads/pdf/TS-1088-ARXXX.pdf, Height=2mm, Manufacturer_Part_Number=TS-1088-AR02016
SW1 SW2: library part SS-22F32-G060, "C2848931", Actuator Color=Black, Current Rating=1A, JLCPCB Part Class="Extended Part", LCSC Part Name="柄长6mm 直插两档 滑动开关", Manufacturer=G-Switch(品赞), Operating Temperature=-25℃~+70℃, Voltage Rating=24V, Actuator Style="Rectangular Columnar", Add into BOM=yes, Circuit=DPDT, Convert to PCB=yes, Datasheet=https://item.szlcsc.com/datasheet/SS-22F32-G060/3048280.html, Device=SS-22F32-G060, Length=23.2mm, Life="10,000 Cycles", Manufacturer Part=SS-22F32-G060, Mounting Type="Through Hole", Supplier=LCSC, Supplier Footprint=插件,23.2x7.5mm, Supplier Part=C2848931, Switch Height=13mm, Symbol=SS-22F32-G060, Termination Style="PC Pin", Width=7.5mm
U1: library part CM1022-CA, "C22446437", Battery Temperature Detection=Support, Charging Saturation Voltage=4.25V, End-Off Voltage=2.5V, JLCPCB Part Class="Extended Part", LCSC Part Name=2节,带温度保护, Manufacturer=iCM(创芯微), Operating Temperature=-40℃~+85℃, Supply Current (Iq)=5uA, Add into BOM=yes, Convert to PCB=yes, Datasheet=https://item.szlcsc.com/datasheet/CM1022-CA/24098222.html, Device=CM1022-CA, Manufacturer Part=CM1022-CA, Number of Cells=2, Supplier=LCSC, Supplier Footprint=MSOP-10, Supplier Part=C22446437, Symbol=CM1022-CA, The Chip Type="Protection IC", Type of Battery=Lithium-ion/Polymer
U2: library part "YHE-YG16-001 SH1B166A1", Manufacturer=YTL(亚特联), Add into BOM=yes, Convert to PCB=yes, Datasheet=https://atta.szlcsc.com/upload/public/pdf/source/20241210/EC2F2FFC22DA7A673EF560687C693A55.pdf, Device="YHE-YG16-001 SH1B166A1", LCSC Part Name="YHE-YG16-001 SH1B166A1", Manufacturer Part="YHE-YG16-001 SH1B166A1", Supplier=LCSC, Supplier Footprint=插件, Supplier Part=C42411044, Symbol="YHE-YG16-001 SH1B166A1"

## Free pads (board coordinates)
  round 314.96 hole 125.98 unplated: 1(1297,1368) 1(1300,4600) 1(3094,1370) 1(3134,4597)

## Via types
v1: diameter 24, hole 12, Top Layer to Bottom Layer, 68 vias
v2: diameter 18, hole 12, Top Layer to Bottom Layer, 17 vias

## Nets (pads, with @x,y where several pads share a name; then routed paths per layer and width w, separated by ;. In a path a pad name is that pad's centre, name@x,y a point inside that pad or via, vN(x,y) a via of type N, cw(c..) or ccw(c..) an arc to the next point about the centre after c; other vN are vias at no path point)
+3V3: C2.2 C3.2 C11.1 C12.1 C14.1 C15.2 D4.1 IC2.1 IC3.7 IC3.8 J3.1 L1.2 M1.2 R3.1 R8.2 R12.1 R13.2 R14.1 R16.1 R20.1 U2.1 | length 4133.3
  Top Layer w12: R12.1 2378,2870.5 R16.1 2378,3127.86 2450,3199.86 v2(2450,3472) ; R3.1 R3.1@2394.06,3835 ; R13.2@2628,3581.26 v2(2628,3615.78) ; IC2.1@2973.79,3396.47 IC2.1
  Top Layer w15: R14.1 3018.25,3800.75 3070.25,3800.75 3083.5,3787.5 3083.5,3786.5 3109,3761 3202,3761
  Top Layer w20: R8.2 1958,4383 1961,4386 ; C2.2 1934.06,4304.06 1968,4338 ; R3.1@2394.06,3835 2394.84,3835 2453,3776.84 v2(2453,3612)
  Top Layer w40: IC2.1 2973.79,3502.18 C12.1@2981.06,3509.46 ; C12.1 2979.5,3510.96 3061.5,3510.96 C11.1 3064.64,3513.09 3141.09,3513.09 3202,3574 3202,3761 3202,3854.07 3175.07,3881 R20.1@3117,3881
  Top Layer w50: M1.2 1903.5,4665 1909.5,4659 D4.1 ; D4.1@1935.09,4659 1940.6,4653.49 1940.6,4640.69 1961,4620.29 1961,4386 1961,4257 ; 2295.64,4141.36 2384.44,4052.56 U2.1@2558.68,4052.56 ; U2.1@2567.06,4076.56 2567.06,4203.71 2596.35,4233 2959.71,4233 2989,4203.71 2989,4022.46 2995.26,4016.2 2995.26,3983.69 C15.2@3000.38,3978.57 ; C15.2@3002.83,3978.57 3068.4,3913
  Bottom Layer w12: v2(2450,3472) 2450,3597 2451.91,3598.91 2451.91,3610.91 v2(2453,3612) 2622.6,3612 2626.38,3615.78 v2(2628,3615.78)
+5_Charging: C21.1 C22.1 IC4.7 IC4.16 L2.2 R30.2 R31.2 R33.1 SW1.4 SW2.5 | length 1584.3
  Top Layer w12: 1525.08,2926 1988.5,2926 R31.2 ; IC4.7 1913.5,2663.66 2114.28,2663.66 2121.31,2670.69 R33.1
  Top Layer w40: SW1.4 1526.39,3083.29 1527.5,3083.29 1527.5,2963.71 1525.08,2961.28 1525.08,2926 1525.08,2837.42 R30.2 ; R30.2@1527.5,2831.47 1551.16,2807.8 1551.16,2798.15 1560.91,2788.41 1560.91,2742.64 C21.1 ; C21.1@1563.54,2736.06 1569.52,2730.09 1569.52,2500.53 1591.05,2479 1625.36,2479 1722.02,2382.33 1722.02,2361.35 1725.37,2358 SW2.5
+5_preswitch: J1.A4_B9 J1.A9_B4 SW2.4 | length 1638.7
  Top Layer w18: 2849.98,2336.98 2834,2321 2831,2318 2832,2318 2930,2220 2991.22,2220 3018.46,2247.24 3018.46,2469.54 2964.86,2523.15 2942.81,2523.15 J1.A9_B4
  Top Layer w25: 2849.98,2336.98 J1.A4_B9
  Top Layer w35: SW2.4 1928.76,2358 1934.41,2352.34 1934.41,2345.28 1958.7,2321 2834,2321
  Top Layer w50: SW2.4 SW2.4@1917.9,2358
-: D4.2 M1.1 Q3.3 | length 626.3
  Top Layer w25: M1.1 1741.91,4712.91 2017.01,4712.91 2070.91,4659 D4.2 2099.37,4674.66 2099.37,4712.37 2140.31,4753.31 Q3.3
Bat+: IC4.12 SW1.6 SW2.2 | length 1479.1
  Top Layer w40: SW2.2 1749.36,2256 SW2.2@1781,2256 ; SW2.2@1772.63,2255.64 1827,2310.01 1827,2442.28 1850.43,2465.71 2092.71,2465.71 2190,2563 2190,2929.55 2188.26,2931.29 2188.26,3001.31 2102.93,3086.64 SW1.6@1881,3086.64 ; SW1.6 1838.36,3087 SW1.6@1881,3087
Bat+_Preswitch: J4.3 R15.1 SW2.3 | length 1125.8
  Top Layer w50: SW2.3 1568.29,2255.64 1539,2226.35 1539,1447.57 J4.3 1631.57,1501.57 1635,1505
Bat-: C16.2 C17.2 J4.1 R26.1 R27.1 RNTC1.1 U1.3 | length 1477.8
  Top Layer w12: U1.3 1907.4,1855 1919,1843.4
  Top Layer w20: C16.2 1849.64,2000.91 1889.09,2000.91 1931,1959
  Top Layer w40: C17.2 1733.94,1721.46 1799,1656.39 ; RNTC1.1 1967,1995 1919,1947 1919,1843.4 1799,1723.4 1799,1656.39 ; R27.1@2172.54,1387.54 2140,1355 J4.1 1828.43,1468.83 1799,1498.26 1799,1656.39
"Charging Select": IC4.9 SW1.2 | length 764.7
  Top Layer w8: SW1.2 1694.11,3189 1712.23,3170.87 1712.23,3160.75 1759,3113.98 1759,3055 1863,2951 v1(1896,2951) ; IC4.9 1959.81,2626.14 1965.67,2632 v1(1970,2632)
  Bottom Layer w8: v1(1896,2951) 1970,2877 v1(1970,2632)
ESP_CC1: J1.A5 R1.1 | length 280.4
  Top Layer w12: R1.1 2674,2393.14 2684.88,2382.26 J1.A5
ESP_CC2: J1.B5 R2.1 | length 96.8
  Top Layer w12: R2.1 2845.77,2500.28 2939.91,2500.28 J1.B5
ESP_USB_D_N: D3.1 IC2.13 J1.A7 J1.B7 | length 634.4
  Top Layer w14.97: IC2.13 2678.51,2707.5 2688.74,2697.26 2689.28,2697.26 2698.05,2688.5 2698.05,2459.7 2756.1,2401.66 2939.72,2401.66 J1.B7 2976.94,2401.94 2990,2415 2990,2433.23 2981.23,2442 2967,2442
ESP_USB_D_P: D2.1 IC2.14 J1.A6 J1.B6 | length 587.5
  Top Layer w14.97: IC2.14 2737.57,2707.5 2727.34,2697.26 2726.79,2697.26 2718.02,2688.5 2718.02,2467.98 2764.37,2421.63 2861,2421.63 ; 2917,2461 2876,2461 2861,2446 2861,2421.63 ; J1.A6 2861,2421.63
GND: B1.1 B1.2 B2.1 B2.2 B3.1 B3.2 B4.1 B4.2 C2.1 C3.1 C4.2 C5.2 C6.2 C8.2 C9.2 C10.1 C11.2 C12.2 C13.2 C14.2 C15.1 C18.2 C19.2 C21.2 C22.2 D1.2 D2.2 D3.2 IC1.7 IC2.9 IC2.19 IC2.20 IC2.21 IC2.22 IC2.23 IC2.24 IC2.25 IC2.26 IC2.27 IC3.3 IC3.11 IC3.15 IC3.17 IC4.5 IC4.8 IC4.15 J1.A1_B12 J1.A12_B1 J2.1 J5.1 LED1.2 LED2.1 Q2.2 Q3.2 R1.2 R2.2 R4.1 R7.2 R9.2 R10.2 R18.1 R29.1 R32.1 RT1.1 S1.1 S2.1 U2.5 U2.6 | length 3262.9
  Top Layer w8: v1(1185,3503) LED2.1@1243.35,3503 ; C22.2@1645.27,2688.39 1646.23,2687.43 1646.23,2683.4 1667.72,2661.91 1684.09,2661.91 v2(1686,2660) 1741.42,2660 C18.2 1757.56,2643.86 IC4.15 IC4.8 ; IC4.5@1897.5,2689.58 1897.5,2703.2 1908.3,2714 v2(1931,2714) ; v2(2500,3460) 2500,3409.63 IC2.9 ; v2(2561,2403) R1.2 2609,2471.02 2636.98,2499 D3.2 ; D2.2 2776.97,2497 2821.3,2541.33 2821.3,2550.66 R2.2@2834.14,2563.5 ; v2(2811,2597) 2812.91,2595.09 2812.91,2584.72 R2.2@2834.14,2563.5 ; v2(2906,2283) 2906.69,2283 2929.17,2305.49 J1.A1_B12 ; J1.A12_B1 2850.04,2557.46 R2.2 R2.2@2834.14,2563.5
  Top Layer w12: v1(2249,2002) 2249,1963.5 R18.1 ; v1(2336,3278) 2336,3226.31 S2.1 ; v2(2757.07,3869) 2758.21,3870.15 2758.21,3883.82 2770.64,3896.24 IC3.15 2835.69,3896.24 IC3.17 2835.69,3915.93 IC3.11 ; v1(2783,3993) 2823.66,3993 2835.59,3981.07 IC3.11@2835.59,3973.91 ; IC3.3 2855.37,3813.88 2864,3805.25 v1(2864,3802) v1@2865.54,3802 ; C13.2@2884,3689.71 v1(2884,3737) ; v1(2931,3570) 2977.54,3570 C12.2 ; v1(3048,3683) 3095.24,3683 S1.1 ; C11.2 3062.54,3567 v1(3105,3567)
  Top Layer w20: v2(1504,2681) 1504,2737.54 C21.2 ; v2(1650,4330) 1650,4373.4 LED1.2@1657,4380.4 ; v2(1928.43,2871.57) 1928.43,2846.18 1941.06,2833.54 C19.2 ; Q3.2 2292.69,4666.69 v2(2293,4667) ; v1(3075,4112.34) 3075.77,4111.57 3075.77,4080.57 3075.54,4080.35 C14.2@3075.54,4078 ; C14.2 3088.36,4052.18 3088.36,3997.82 C15.1
  Top Layer w35: B4.2 2563.69,1717.69 v1(2568,1722) 2563.69,1726.31 2563.69,1868.6 B4.1@2565.88,1870.78 ; v1(2830,2022) 2830,2183.86 B2.1@2832.88,2186.74 ; B2.2 v1@2830.69,2021.31 ; B3.2 2853.69,1442.69 v1(2854,1443) 2853.69,1443.31 B3.1 ; v1(3031,2078) 3031,2114.84 3031.66,2115.5 R4.1 3121.11,2115.5 3127.06,2121.46 C10.1 ; B1.2@3126,1557.14 3126,1756 v1(3125,1757) 3126,1758 B1.1@3126,1891.78
  other v1: 2120,1690 2150,1690 2120,1730 2150,1730 2600,2900 2700,2900 2800,2900 2900,2900 2600,3000 2900,3000 2600,3100 2700,3100 2800,3100 2900,3100 2600,3200 2700,3200 2800,3200 2900,3200 1730,3475 1770,3475 1810,3475 1730,3515 1770,3515 1810,3515 1750,3675 1790,3675 1750,3715 1790,3715 1750,3755 1790,3755 1750,3795 1790,3795 1750,3835 1790,3835
IO0: B1.3 IC2.18 | length 903.7
  Top Layer w14.97: v1(2872,2227) 2896,2203 2896,1962.85 2948.53,1910.32 B1.3 ; v1(2900,2649) 2901.73,2650.73 2917.02,2650.73 2973.79,2707.5 IC2.18
  Bottom Layer w14.97: v1(2872,2227) 2870.27,2228.73 2870.27,2237.73 2870,2238 2870,2619.69 2899.31,2649 v1(2900,2649)
IO1: B3.3 IC2.17 | length 1233
  Top Layer w14.97: B3.3 2676.53,1597.32 2781,1701.79 2781,2206 v1(2828,2253) ; v1(2850,2647) 2851.73,2648.73 2855.96,2648.73 2914.73,2707.5 IC2.17
  Bottom Layer w14.97: v1(2828,2253) 2828,2439 2850,2461 v1(2850,2647)
IO2: B2.3 IC2.16 R12.2 | length 1164.2
  Top Layer w14.97: R12.2 2382.86,2800.5 2414.36,2769 2817.8,2769 2855.68,2731.12 IC2.16 2845.45,2709.08 2845.45,2689.45 v1(2807,2651) ; B2.3 2693.47,2185.47 v1(2787,2279)
  Bottom Layer w14.97: v1(2787,2279) 2787,2628.56 2807,2648.56 v1(2807,2651)
IO3: B4.3 IC2.15 | length 1108.5
  Top Layer w14.97: B4.3@2402.72,1882.28 2399.53,1885.47 2399.53,2106.53 2569,2276 v1(2742,2276) ; v1(2757,2655) 2786.39,2684.39 2786.39,2709.08 IC2.15
  Bottom Layer w14.97: v1@2746,2270 2746,2641.56 2757,2652.56 v1(2757,2655)
IO4: IC2.3 IC3.1 | length 457.2
  Top Layer w12: IC3.1 2816,3459.77 2855.68,3420.09 IC2.3
IO5: IC2.4 IC3.16 | length 468.2
  Top Layer w12: IC2.4 IC3.16@2796.62,3876.46
IO6: IC2.5 IC3.14 | length 547.2
  Top Layer w12: IC2.5 2737.57,3896.57 2756.83,3915.83 2788.35,3915.83 IC3.14
IO7: IC2.6 U2.3 | length 687.6
  Top Layer w12: IC2.6 2678.51,3420.09 2711,3452.58 2711,3523.78 2711.33,3524.12 2711.33,3599.88 2711,3600.22 2711,4051.35 2724.54,4064.89 U2.3@2724.54,4076.56
IO8: IC2.7 R13.1 U2.2 | length 816.6
  Top Layer w12: IC2.7 IC2.7@2619.46,3420.09 ; R13.1@2619.46,3526 IC2.7@2619.46,3420.09 ; U2.2@2645.8,4076.56 2645,4075.76 2645,3851.97 2682.99,3813.98 2682.99,3582.11 2645,3544.12 2645,3516.5 2645,3445.64 IC2.7@2619.46,3420.09
IO9: IC2.8 R16.2 R34.1 S2.2 | length 1880.1
  Top Layer w12: R34.1@2232.87,4457 2238,4457 2482,4213 v2(2482,4131) ; R16.2 2313,3127.86 2323.84,3138.7 2327.25,3138.7 2389,3200.45 2389,3336.69 S2.2 2337,3437 2400,3500 2500,3500 2560.4,3439.6 ; v1(2482,4011.06) 2482.06,4011 2547.8,4011 2567.24,3991.55 2567.24,3617.8 2560.4,3610.95 2560.4,3439.6 ; IC2.8 2560.4,3439.6
  Bottom Layer w12: v1(2482,4011.06) v2(2482,4131)
IO10: IC2.10 R23.1 R25.2 | length 1534.2
  Top Layer w12: IC2.10 2365.69,2719.31 2278,2807 2278,3448 2362,3532 2496,3532 2518.94,3554.94 R23.1 ; R23.1@2538.94,3658 2539.5,3658.56 R25.2
Midtap: J4.2 R17.1 | length 175.6
  Top Layer w20: R17.1@1730.77,1526.73 R17.1
  Top Layer w50: J4.2 1730,1511.03 1735,1516.03 R17.1
N: IC3.10 J6.1 | length 394.6
  Top Layer w12: IC3.10@2855.46,3973.91 2855.46,3996.22 2859,3999.75 v1(2859,4003)
  Bottom Layer w12: v1(2859,4003) 2892.09,4003 2895,4005.91 3195.09,4005.91 J6.1@3214,3987
NetC1_1: C1.1 D1.1 IC1.8 L1.1 | length 454.8
  Top Layer w15: IC1.8 1904,3815 1947.71,3858.71 1947.71,3892.62 C1.1 1954.09,3983.2 1945.3,3991.99 1941.52,3991.99 1934.1,3999.41 D1.1@1934.1,4007.9 ; C1.1@1954.09,3895.06 1962.15,3887 2149.89,3887 L1.1
NetC1_2: C1.2 IC1.1 | length 295
  Top Layer w15: IC1.1@1674,3815.77 v1(1674,3879) ; v1(1848,3883) 1881.86,3883 1897,3898.14 C1.2
  Bottom Layer w15: v1(1674,3879) 1806,3879 1810,3883 v1(1848,3883)
NetC7_1: C7.1 C8.1 IC1.6 | length 229.4
  Top Layer w15: IC1.6 2006.46,3715 C8.1 2013.94,3711.46 2029.07,3696.32 2029.07,3692.38 2036.46,3685 C7.1
NetC7_2: C7.2 R7.1 | length 77.3
  Top Layer w15: C7.2 2093.54,3680.91 R7.1@2105.14,3692.5
NetC9_1: C9.1 IC1.4 | length 138.6
  Top Layer w25: C9.1@1620,3558.54 1620,3629 1656,3665 IC1.4
NetC10_2: C10.2 J1.SH1 J1.SH2 J1.SH3 J1.SH4 R4.2 | length 842.9
  Top Layer w30: J1.SH4 J1.SH2 J1.SH1 3128.51,2258.91 3128.51,2181.03 3127,2179.52 3035.98,2179.52 R4.2
  Bottom Layer w30: J1.SH3 J1.SH1
NetC13_1: C13.1 IC2.2 R14.2 S1.2 | length 447.9
  Top Layer w12: C13.1@2871,3628 2922,3628 2929.87,3635.87 2929.87,3679.56 2953.15,3702.85 R14.2@2953.15,3783.41 ; C13.1@2875,3620.38 2875,3459.83 2914.73,3420.09 IC2.2
NetC16_1: C16.1 R15.2 U1.1 | length 485.2
  Top Layer w12: R15.2 1629.34,1741.94 1781.76,1894.37 U1.1 1834.45,1953.91 C16.1
NetC17_1: C17.1 R17.2 U1.2 | length 391.9
  Top Layer w12: R17.2 1735,1639 1684,1690 1684,1747.57 1698.34,1761.91 1717.3,1761.91 1750.57,1795.18 1750.57,1808.11 1817.06,1874.59 1834.36,1874.59 U1.2
NetC18_1: C18.1 IC4.10 IC4.13 | length 174.3
  Top Layer w8: C18.1 1760.29,2588.87 1784.87,2588.87 1804.43,2608.43 IC4.10
NetC19_1: C19.1 IC4.3 | length 147.5
  Top Layer w8: IC4.3 1861.14,2735.14 1902.46,2776.46 C19.1
NetC20_1: C20.1 IC4.11 | length 102.1
  Top Layer w12: IC4.11 2008.7,2587.76 C20.1
NetC20_2: C20.2 IC4.14 L2.1 | length 583.9
  Top Layer w8: 1795.13,2626.14 IC4.14
  Top Layer w12: L2.1 1647.48,2579.32 1715.8,2511 v2(1716,2511) ; v2(2066,2511) 2066,2512.62 2069.54,2516.17 C20.2
  Bottom Layer w12: v2(1716,2511) v2(2066,2511)
NetIC1_3: IC1.3 R6.2 R9.1 | length 263.8
  Top Layer w8: R9.1 R6.2 1601,3660 IC1.3@1656,3715
NetIC1_5: IC1.5 R5.2 R10.1 | length 525.9
  Top Layer w15: IC1.5 1886.77,3620.65 1934.42,3573 2253,3573 ; R10.1 2242.5,3685 R5.2
NetIC3_2: IC3.2 R23.2 R25.1 | length 545
  Top Layer w12: R25.1 2604.5,3869.14 2650,3823.64 v1(2650,3747) 2650,3668.94 R23.2@2641.06,3660 ; IC3.2@2836,3841.85 2836,3759 v1(2850,3745)
  Bottom Layer w12: v1(2650,3747) 2651,3746 2849,3746 v1(2850,3745)
NetIC3_4: IC3.4 R20.2 | length 296.9
  Top Layer w12: IC3.4 2875.06,3841.09 2875.15,3841 3095,3841 3112.66,3823.34 3127.16,3823.34 R20.2 ; R20.2@3146.02,3821.48 R20.2@3155,3812.5 ; R20.2@3146.02,3823 R20.2@3147.53,3823
NetIC4_1: IC4.1 LED3.2 | length 127
  Top Layer w12: LED3.2@1789.37,2800.6 1803.05,2786.91 1803.05,2769.95 1825.71,2747.29 IC4.1
NetLED1_1: LED1.1 R8.1 | length 81.6
  Top Layer w20: LED1.1 R8.1@1809,4387
NetLED2_2: LED2.2 R11.2 | length 89.7
  Top Layer w25: LED2.2 1240,3615.64 1257.5,3633.14 R11.2
NetLED3_1: LED3.1 R30.1 | length 215
  Top Layer w12: R30.1 1592.5,2844.86 1623.04,2875.4 LED3.1@1785,2875.4
NetQ1_1: Q1.1 R21.1 | length 106.4
  Top Layer w12: R21.1 1867.5,1685.14 1895.31,1657.33 1914.64,1657.33 1940,1631.97 Q1.1
NetQ1_2: Q1.2 R24.1 R26.2 | length 489.4
  Top Layer w30: R24.1 2020.14,1642.5 1970.42,1592.78 1882.22,1592.78 1865,1610 1852.43,1597.43 1852.43,1522.57 1892.09,1482.91 R26.2
NetQ1_3: Q1.3 Q2.3 R27.2 | length 370.5
  Top Layer w40: Q1.3 2165.63,1551.26 Q2.3 2170,1456.54 R27.2@2168.46,1455
NetQ2_1: Q2.1 R22.1 | length 187.4
  Top Layer w30: R22.1@2150,1792.5 R22.1@2151.84,1790.67 ; R22.1 2172.86,1793.5 2187.23,1779.13 2189.83,1779.13 2207.4,1761.56 Q2.1
NetQ3_1: Q3.1 R34.2 | length 97.9
  Top Layer w14.97: Q3.1 2179.6,4596.49 2195.88,4580.21 R34.2
NetR3_2: R3.2 R5.1 | length 158.5
  Top Layer w15: R5.1 2307.5,3609.86 2356.28,3658.64 2356.28,3698.01 2384.21,3725.94 R3.2
NetR18_2: R18.2 U1.10 | length 235.7
  Top Layer w15: U1.10 2017.12,1895.94 2248.43,1895.94 R18.2
NetR19_1: R19.1 RNTC1.2 U1.5 | length 552.8
  Top Layer w10: R19.1 1947.2,1760.87 1947.2,1805.2 1959,1817 1959,1873.39 2020.67,1935.06 2107.06,1935.06 2127.22,1955.22 2127.22,1976.22 RNTC1.2@2135,1984
  Top Layer w20: v1(1800,1783) 1800,1784.08 1807.33,1791.41 1807.33,1792.33 1824,1809 ; v1(1893,1751) 1893.5,1750.5 1935.84,1750.5 R19.1
  Bottom Layer w20: v1(1800,1783) 1832,1751 v1(1893,1751)
NetR19_2: R19.2 U1.6 | length 78.8
  Top Layer w12: R19.2 1983.66,1751.03 2015.55,1782.91 U1.6
NetR21_2: R21.2 U1.8 | length 363.5
  Top Layer w12: U1.8 2015.64,1854.91 2055.09,1854.91 2080,1830 2080,1680
  Top Layer w15: R21.2@1941.83,1678.66 2078.66,1678.66 2080,1680
NetR22_2: R22.2 U1.9 | length 144
  Top Layer w15: U1.9 2132.82,1874.68 2139.66,1867.83 2143.8,1867.83 2150,1861.64 R22.2@2150,1857.5
NetR24_2: R24.2 U1.7 | length 160.8
  Top Layer w12: U1.7 2034.69,1835.31 2055,1815 2055,1727.6 2050.7,1723.3 2050.7,1718.33 2045.62,1713.26 R24.2@2038.26,1713.26
NetR29_2: R29.2 SW1.3 | length 140.5
  Top Layer w20: R29.2 1831.16,3325.5 1838,3318.67 SW1.3
NetR32_2: R32.2 SW1.1 | length 199.4
  Top Layer w20: SW1.1 1541.26,3189 1627,3274.74 R32.2@1627,3334.65
NTC: IC4.4 R28.2 R33.2 | length 277.9
  Top Layer w8: IC4.4 1879.78,2689.58 1879.78,2703.16 1912.62,2736 1986,2736 1999.82,2722.18 R33.2@2028.51,2722.18 ; R33.2 R33.2@2028.51,2722.18 ; R28.2 2036.69,2730.36 R33.2@2028.51,2722.18
P: IC3.9 J6.2 | length 398.6
  Top Layer w12: IC3.9 2875.06,3973.81 2937,4035.76 v1(2937,4038)
  Bottom Layer w12: v1(2937,4038) 3031.88,4038 3043.12,4026.75 3153.75,4026.75 J6.2
RXD: IC2.11 J7.1 | length 177
  Top Layer w14.97: J7.1 2560.4,2650.4 IC2.11
Temp: R28.1 R31.1 RT1.2 | length 236.6
  Top Layer w12: R31.1 2103,2918 RT1.2 2135,2816.69 R28.1
TXD: IC2.12 J7.2 | length 301.4
  Top Layer w14.97: J7.2 2619.46,2609.46 IC2.12
Vin_Buck: C4.1 C5.1 C6.1 IC1.2 J2.2 R6.1 R11.1 SW1.5 | length 1304.4
  Top Layer w30: 1320,3610.18 1320.66,3610.85 R11.1@1320.66,3659.15 ; 1385,3770 IC1.2@1673.23,3770
  Top Layer w35: 1290,3735 1320,3705 ; J2.2@1320,3425 1320,3610.18 ; R11.1@1320,3659.82 1320,3705 ; 1323,3350 J2.2 ; 1385,3770 1320,3705
  Top Layer w40: 1323,3350 1323,3263 1448,3138 1601.61,3138 1652.97,3086.64 SW1.5 1680.88,3087 SW1.5@1710,3087
pads on no net: B1.4 B2.4 B3.4 B4.4 IC3.5 IC3.6 IC3.12 IC3.13 IC4.2 IC4.6 J1. J1.A8 J1.B8 SW2.1 SW2.6 U1.4 U2.4

## Polygon pours and split planes (outlines as drawn)
Bat+ on Top Layer "BAT+_L01_P031" (solid, pour order 31): 1786,3114 1893,3114 1893,3057 1787,3057
Vin_Buck on Top Layer "VIN_BUCK_L01_P030" (solid, pour order 30): 1623,3115 1730,3115 1730,3058 1624,3058